# Altium PCB Brain_Stim_Main.PcbDoc (part 1 of 2)
Units mil, origin at the board's own origin, x right, y up, seen from the top; angles counter-clockwise.
Board outline 3955.03 x 5620.03 mil, 4 copper layers (Top Layer, Internal 1, Internal 2, Bottom Layer), stack 23.756 mil thick; 133 components, 111 nets, 539 pads, 126 vias.
Unrouted connection lines stored in the file: 299.
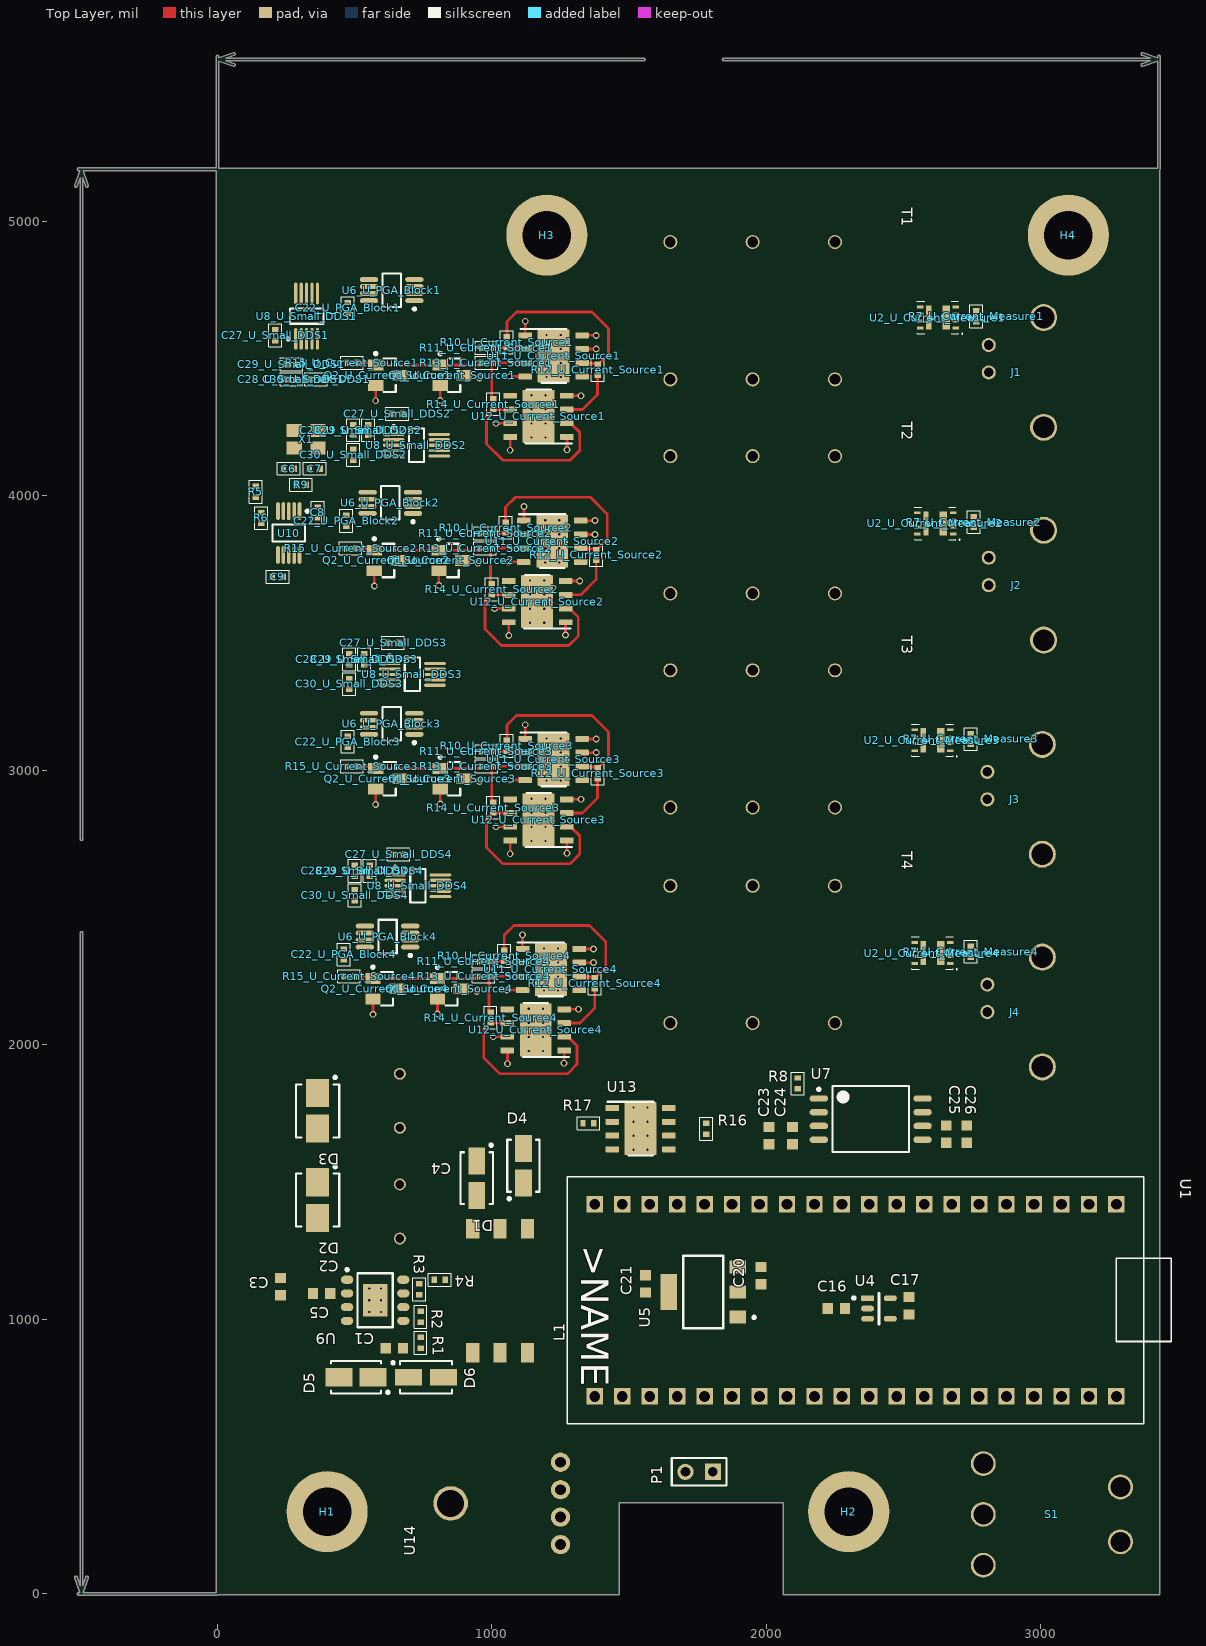
[diagram p0: Top Layer view]
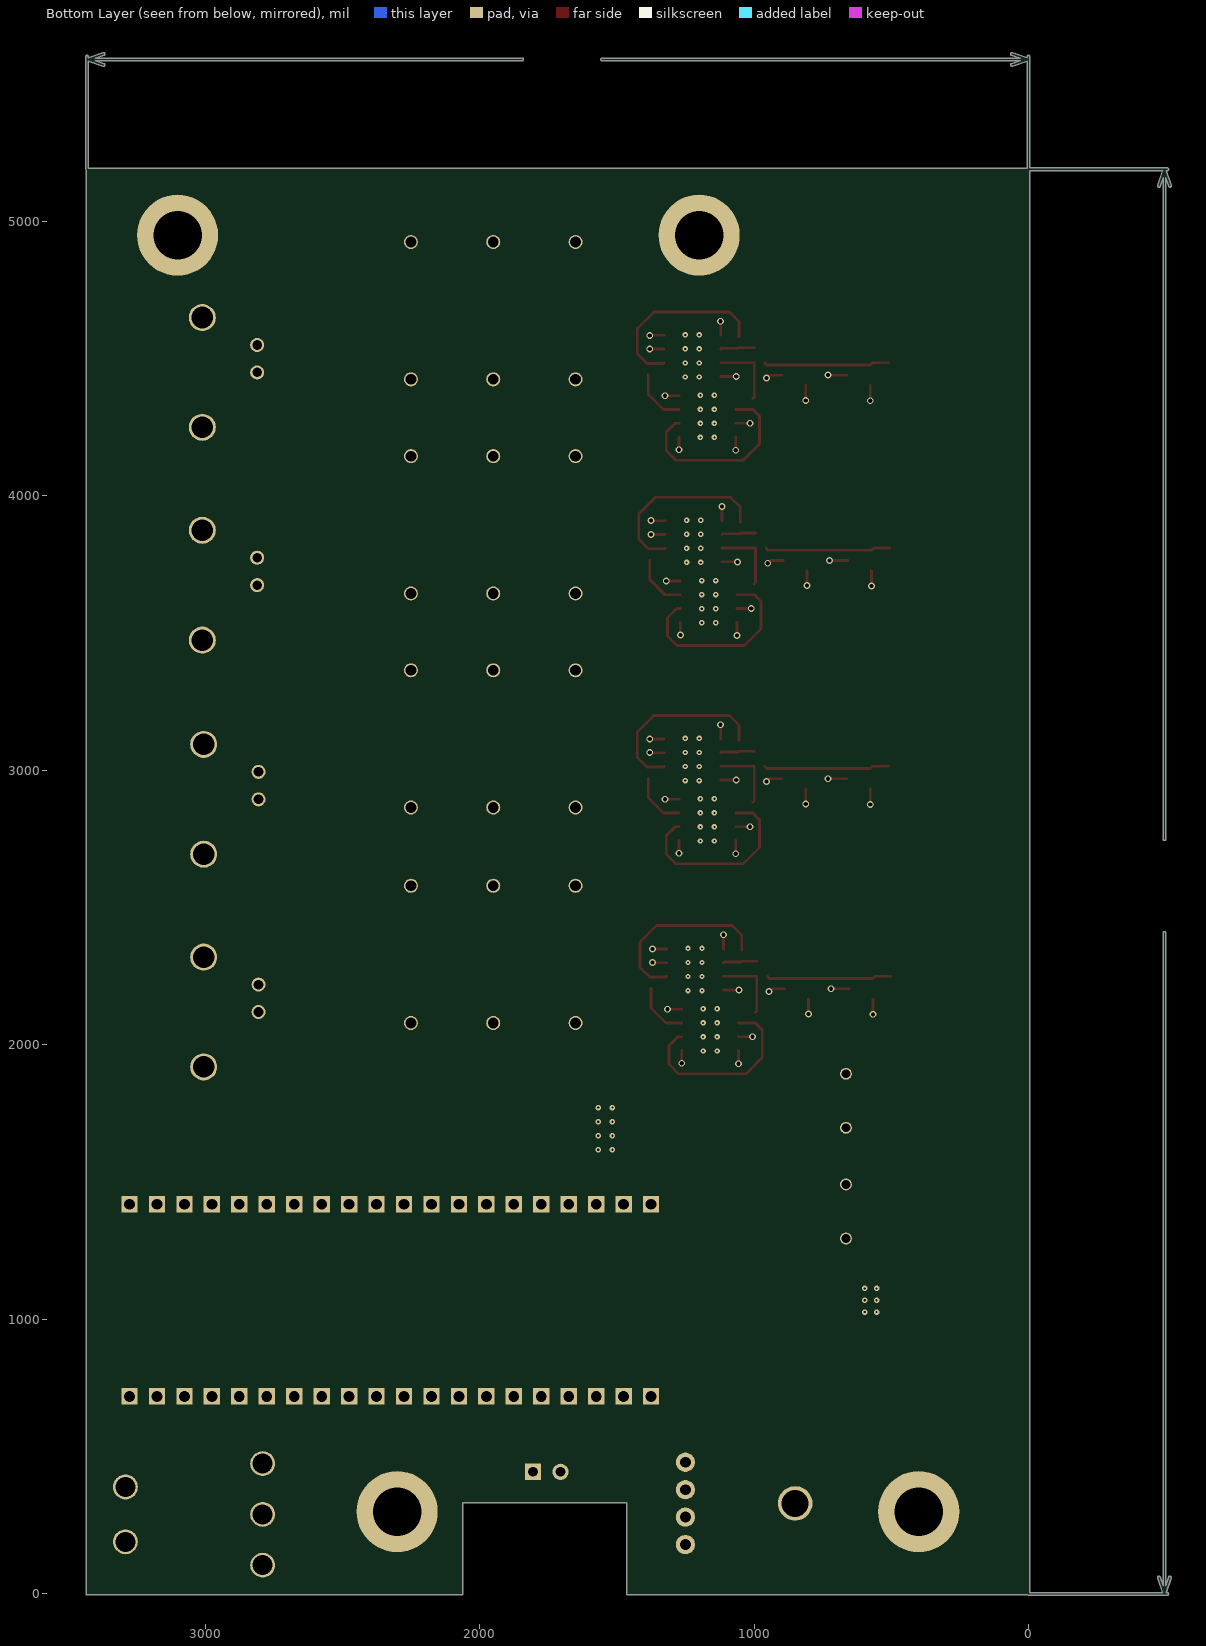
[diagram p1: Bottom Layer view, seen from below]

## Layer stack, top to bottom
Top Solder: solder mask 0.4, Solder Resist, Dk 3.5
Top Layer: signal copper 1.4
Dielectric 2: prepreg 2.8, PP-006, Dk 4.1
Internal 1: signal copper 1.378
Dielectric 1: dielectric 12.6, FR-4, Dk 4.8
Internal 2: signal copper 1.378
Dielectric 3: prepreg 2.8, PP-006, Dk 4.1
Bottom Layer: signal copper 1.4
Bottom Solder: solder mask 0.4, Solder Resist, Dk 3.5

## Board outline
-501.96,5.02 -519.76,58.41 cw(c-515,60) -510.24,61.59 -500.01,30.9 -500.01,2408.05 cw(c-495,2408.05) -489.99,2408.05 -489.99,30.9 -479.76,61.59 cw(c-475,60) -469.99,60 -470.24,58.41 -488.04,5.02 -3.52,5.02 -3.52,5184.99 -488.04,5184.99 -470.24,5131.59 -469.99,5130 cw(c-475,5130) -479.76,5128.41 -489.99,5159.1 -489.99,2749.95 cw(c-495,2749.95) -500.01,2749.95 -500.01,5159.1 -510.24,5128.41 cw(c-515,5130) -519.76,5131.59 -501.96,5184.99 -505,5184.99 cw(c-505,5190) -505,5195.01 -5.01,5195.01 -5.01,5600 cw(c0,5600) 5.01,5600 5.01,5596.96 58.41,5614.76 cw(c60,5610) 65.01,5610 cw(c60,5610) 61.59,5605.24 30.9,5595.01 1553.04,5595.01 cw(c1553.04,5590) 1558.06,5590 cw(c1553.04,5590) 1553.04,5584.99 30.9,5584.99 61.59,5574.76 cw(c60,5570) 65.01,5570 cw(c60,5570) 58.41,5565.24 5.01,5583.04 5.01,5193.52 3424.99,5193.52 3424.99,5583.04 3371.59,5565.24 cw(c3370,5570) 3368.41,5574.76 3399.1,5584.99 1844.96,5584.99 cw(c1844.96,5590) 1844.96,5595.01 3399.1,5595.01 3368.41,5605.24 cw(c3370,5610) 3371.59,5614.76 3424.99,5596.96 3424.99,5600 cw(c3430,5600) 3435.01,5600 3435.01,5190 3433.52,5186.43 3433.52,0 cw(c3430,0) 3430,-3.52 2065,-3.52 cw(c2065,0) 2061.48,0 2061.48,331.48 1463.52,331.48 1463.52,0 cw(c1460,0) 1460,-3.52 3.57,-3.52 0,-5.02 -505,-5.02 cw(c-505,0)

## Design rules (kind name [scope] priority, off if disabled: settings)
BoardOutlineClearance [All] p1: gap=7.87 ignorepadtopadclearanceinfootprint=FALSE
Clearance [All] p1: gap=4 ignorepadtopadclearanceinfootprint=FALSE except(5: Arc-Via Track-Via SMDPad-Via THPad-Via Via-Via Via-Fill Via-Poly Via-Region Via-Text; 9.84: Arc-Hole Track-Hole SMDPad-Hole THPad-Hole Via-Hole Fill-Hole Poly-Hole Region-Hole Text-Hole)
ComponentClearance [All] p1: gap=4 collisioncheckmode=3 verticalgap=4 showdistances=TRUE
DiffPairsRouting [All] p1: maxlimit=4 minlimit=4 mostfreqgap=4 toplayer_minwidth=4 toplayer_maxwidth=71497.94 toplayer_prefwidth=4 midlayer1_minwidth=4 midlayer1_maxwidth=71497.94 midlayer1_prefwidth=4 midlayer2_minwidth=4 midlayer2_maxwidth=71497.94 midlayer2_prefwidth=4 bottomlayer_minwidth=4 bottomlayer_maxwidth=71497.94 bottomlayer_prefwidth=4 maxuncoupledlength=500
Height [All] p1: minheight=0 maxheight=71497.94 prefheight=500
HoleSize [All] p1: absolutevalues=TRUE maxlimit=248.03 minlimit=7.87 maxpercent=80.000 minpercent=20.000
HoleToHoleClearance [All] p1: gap=9.84 allowstackedmicrovias=FALSE
MinimumAnnularRing [All] p1: minimumring=3
MinimumSolderMaskSliver [All] p1: minsoldermaskwidth=0
PlaneClearance [All] p1: clearance=4
PlaneConnect PlaneConnectPowerPads [InPadClass('PowerPads')] p1: planeconnectstyle=Direct reliefexpansion=20 reliefentries=4 reliefconductorwidth=10 reliefairgap=10
PlaneConnect [All] p2: pad.planeconnectstyle=Relief pad.reliefexpansion=11.81 pad.reliefentries=4 pad.reliefconductorwidth=4 pad.reliefairgap=4 via.planeconnectstyle=Direct via.reliefexpansion=11.81 via.reliefentries=4 via.reliefconductorwidth=5 via.reliefairgap=5
PolygonConnect PolygonConnectPowerPads [All vs (InPadClass('PowerPads'))] p1: connectstyle=Direct reliefconductorwidth=10 reliefentries=4 polygonreliefangle="90 Angle" airgapwidth=10
PolygonConnect [All] p2: thpad.connectstyle=Relief thpad.reliefconductorwidth=4 thpad.reliefentries=4 thpad.polygonreliefangle="90 Angle" thpad.airgapwidth=4 smdpad.connectstyle=Relief smdpad.reliefconductorwidth=4 smdpad.reliefentries=4 smdpad.polygonreliefangle="90 Angle" smdpad.airgapwidth=4 via.connectstyle=Direct via.reliefconductorwidth=5 via.reliefentries=4 via.polygonreliefangle="90 Angle" via.airgapwidth=5
RoutingVias [All] p1: holewidth=7.87 width=17.72 viastyle="Through Hole" minholewidth=7.87 minwidth=17.72 maxholewidth=248.03 maxwidth=257.87
SilkToSilkClearance [All] p1: silktosilkclearance=0
SilkToSolderMaskClearance [IsPad] p1: minsilkscreentomaskgap=4 clearancetoexposedcopper=TRUE
SolderMaskExpansion [All] p1: expansion=2.95 istentingtop=FALSE
Width [All] p1: maxlimit=71497.94 minlimit=4 preferedwidth=4
20 further rules are at their usual default settings.

## Classes and differential pairs
channel class Current_Source: U_Current_Source1 U_Current_Source2 U_Current_Source3 U_Current_Source4
net class CS_OUT[1..4]: CS_OUT1 CS_OUT2 CS_OUT3 CS_OUT4
net class CS_IN_SIG[1..4]: CH_AMP1 CH_AMP2 CH_AMP3 CH_AMP4
channel class Small_DDS: U_Small_DDS1 U_Small_DDS2 U_Small_DDS3 U_Small_DDS4
net class DDS_OUT[4..1]: DDS_OUT1 DDS_OUT2 DDS_OUT3 DDS_OUT4
net class DDS_FSYNC[4..1]: DDS_FSYNC1 DDS_FSYNC2 DDS_FSYNC3 DDS_FSYNC4
component class U_MCU: *
net class CH_AMP[4..1]: CH_AMP1 CH_AMP2 CH_AMP3 CH_AMP4
net class \P\G\A\_\C\S\[4..1]: \P\G\A\_\C\S\1 \P\G\A\_\C\S\2 \P\G\A\_\C\S\3 \P\G\A\_\C\S\4
channel class PGA_Block: U_PGA_Block1 U_PGA_Block2 U_PGA_Block3 U_PGA_Block4
channel class Current_Measure: U_Current_Measure1 U_Current_Measure2 U_Current_Measure3 U_Current_Measure4
net class Wave_In[4..1]: DDS_OUT1 DDS_OUT2 DDS_OUT3 DDS_OUT4
net class TF_LOW[4..1]: TF_LOW1 TF_LOW2 TF_LOW3 TF_LOW4
net class FROM_BRAIN[4..1]: FROM_BRAIN1 FROM_BRAIN2 FROM_BRAIN3 FROM_BRAIN4
net class ADC_DATA[4..1]: ADC_DATA1 ADC_DATA2 ADC_DATA3 ADC_DATA4

## Components (designator, comment, footprint, x,y, rotation, side; value= is the part's Value field where it differs from the comment)
C1 "Cap" CAPC1608X05N 645,895 r180 top value=0.47u
C2 "220uF Cap" A759KR227M1VAAE024 665,1491.85 r180 top
C3 "Cap" CAPC1608X05N 230,1120 r270 top value=10u
C4 "220uF Cap" A759KR227M1VAAE024 665,1895 r180 top
C5 "Cap" CAPC1608X05N 380,1095 r0 top value=1u
C6 "Cap" 0402_Res 260,4100 r0 top value="4p DNP"
C7 "Cap" 0402_Res 355,4100 r180 top value="4p DNP"
C8 "Cap" 0402_Res 365,3940 r90 top value=0.1u
C9 "Cap" 0402_Res 220,3705 r0 top value=0.1u
C16 "Cap" CAPC1608X05N 2255,1040 r0 top value=1u
C17 "Cap" CAPC1608X05N 2520,1050 r90 top value=1u
C20 "Cap" CAPC1608X05N 1980,1160 r90 top value=1u
C21 "Cap" CAPC1608X05N 1560,1130 r270 top value=4.7u
C22_U_PGA_Block1 "Cap" 0402_Res 475,4685 r90 top value=0.1u (schematic designator C22)
C22_U_PGA_Block2 "Cap" 0402_Res 470,3910 r90 top value=0.1u (schematic designator C22)
C22_U_PGA_Block3 "Cap" 0402_Res 475,3105 r90 top value=0.1u (schematic designator C22)
C22_U_PGA_Block4 "Cap" 0402_Res 460,2330 r90 top value=0.1u (schematic designator C22)
C23 "Cap" CAPC1608X05N 2010,1670 r90 top value=10u
C24 "Cap" CAPC1608X05N 2095,1670 r90 top value=0.1u
C25 "Cap" CAPC1608X05N 2655,1675 r90 top value=0.22u
C26 "Cap" CAPC1608X05N 2730,1675 r90 top value=10u
C27_U_Small_DDS1 "Cap" 0402_Res 210,4585.31 r90 top value=10u (schematic designator C27)
C27_U_Small_DDS2 "Cap" 0402_Res 655.31,4300 r0 top value=10u (schematic designator C27)
C27_U_Small_DDS3 "Cap" 0402_Res 640.31,3465 r0 top value=10u (schematic designator C27)
C27_U_Small_DDS4 "Cap" 0402_Res 660.31,2695 r0 top value=10u (schematic designator C27)
C28_U_Small_DDS1 "Cap" 0402_Res 270,4425 r0 top value=0.1u (schematic designator C28)
C28_U_Small_DDS2 "Cap" 0402_Res 495,4240 r270 top value=0.1u (schematic designator C28)
C28_U_Small_DDS3 "Cap" 0402_Res 480,3405 r270 top value=0.1u (schematic designator C28)
C28_U_Small_DDS4 "Cap" 0402_Res 500,2635 r270 top value=0.1u (schematic designator C28)
C29_U_Small_DDS1 "Cap" 0402_Res 270,4480 r0 top value=10u (schematic designator C29)
C29_U_Small_DDS2 "Cap" 0402_Res 550,4240 r270 top value=10u (schematic designator C29)
C29_U_Small_DDS3 "Cap" 0402_Res 535,3405 r270 top value=10u (schematic designator C29)
C29_U_Small_DDS4 "Cap" 0402_Res 555,2635 r270 top value=10u (schematic designator C29)
C30_U_Small_DDS1 "Cap" 0402_Res 359.69,4425 r180 top value=0.1u (schematic designator C30)
C30_U_Small_DDS2 "Cap" 0402_Res 495,4150.31 r90 top value=0.1u (schematic designator C30)
C30_U_Small_DDS3 "Cap" 0402_Res 480,3315.31 r90 top value=0.1u (schematic designator C30)
C30_U_Small_DDS4 "Cap" 0402_Res 500,2545.31 r90 top value=0.1u (schematic designator C30)
D1 "Schottky 60V" "SK36A-LTP - duplicate" 945,1515 r270 top
D2 "Zener 30V" SMBJ5363B-TP 365,1435.04 r270 top
D3 "Zener 30V" SMBJ5363B-TP 365,1760 r270 top
D4 "Schottky 60V" "SK36A-LTP - duplicate" 1115,1560 r90 top
D5 "Zener 24V" "CMZ5934B TR13 PBFREE" 505,790 r180 top
D6 "Schottky 60V" "SK36A-LTP - duplicate" 760,790 r0 top
H1 "M4 Mounting Hole" "Mounting Hole"#1 805,525 r0 top
H2 "M4 Mounting Hole" "Mounting Hole"#2 2360,260 r0 top
H3 "M4 Mounting Hole" "Mounting Hole"#3 1300,4900 r0 top
H4 "M4 Mounting Hole" "Mounting Hole"#4 3120,5000 r0 top
J1 "BNC Connector" CONBNC002 2810,4650 r270 top
J2 "BNC Connector" CONBNC002 2810,3875 r270 top
J3 "BNC Connector" CONBNC002 2805,3095 r270 top
J4 "BNC Connector" CONBNC002 2805,2320 r270 top
L1 "Flyback Transformer" 750319949 1130,879.21 r90 top
P1 "Header 2" HDR1X2 1805,445 r180 top
Q1_U_Current_Source1 "Attenuator JFET" MMBF4117 855,4440 r0 top (schematic designator Q1)
Q1_U_Current_Source2 "Attenuator JFET" MMBF4117 850,3765 r0 top (schematic designator Q1)
Q1_U_Current_Source3 "Attenuator JFET" MMBF4117 855,2970 r0 top (schematic designator Q1)
Q1_U_Current_Source4 "Attenuator JFET" MMBF4117 845,2205 r0 top (schematic designator Q1)
Q2_U_Current_Source1 "Attenuator JFET" MMBF4117 620,4440 r0 top (schematic designator Q2)
Q2_U_Current_Source2 "Attenuator JFET" MMBF4117 615,3765 r0 top (schematic designator Q2)
Q2_U_Current_Source3 "Attenuator JFET" MMBF4117 620,2970 r0 top (schematic designator Q2)
Q2_U_Current_Source4 "Attenuator JFET" MMBF4117 610,2205 r0 top (schematic designator Q2)
R1 "Res1" 0402_Res 740,915 r270 top value=39
R2 "Res1" 0402_Res 740,1010 r90 top value=158k
R3 "Res1" 0402_Res 735,1110 r270 top value=115k
R4 "Res1" 0402_Res 810,1145 r180 top value=10k
R5 "DNP" 0402_Res 140,4015 r90 top value=4.7k
R6 "DNP" 0402_Res 160,3920 r270 top value=4.7k
R7_U_Current_Measure1 "Res1" 0402_Res 2765,4655 r90 top value=10 (schematic designator R7)
R7_U_Current_Measure2 "Res1" 0402_Res 2755,3905 r90 top value=10 (schematic designator R7)
R7_U_Current_Measure3 "Res1" 0402_Res 2745,3115 r90 top value=10 (schematic designator R7)
R7_U_Current_Measure4 "Res1" 0402_Res 2745,2340 r90 top value=10 (schematic designator R7)
R8 "Res1" 0402_Res 2115,1860 r270 top value=4.7k
R9 "DNP" 0402_Res 305,4040 r180 top value=1M
R10_U_Current_Source1 "DNP" 0402_Res 1055,4560 r90 top value=20k (schematic designator R10)
R10_U_Current_Source2 "DNP" 0402_Res 1050,3885 r90 top value=20k (schematic designator R10)
R10_U_Current_Source3 "DNP" 0402_Res 1055,3090 r90 top value=20k (schematic designator R10)
R10_U_Current_Source4 "DNP" 0402_Res 1045,2325 r90 top value=20k (schematic designator R10)
R11_U_Current_Source1 "DNP" 0402_Res 980,4540 r180 top value=100k (schematic designator R11)
R11_U_Current_Source2 "DNP" 0402_Res 975,3865 r180 top value=100k (schematic designator R11)
R11_U_Current_Source3 "DNP" 0402_Res 980,3070 r180 top value=100k (schematic designator R11)
R11_U_Current_Source4 "DNP" 0402_Res 970,2305 r180 top value=100k (schematic designator R11)
R12_U_Current_Source1 "DNP" 0402_Res 1385,4460 r90 top value=100 (schematic designator R12)
R12_U_Current_Source2 "DNP" 0402_Res 1380,3785 r90 top value=100 (schematic designator R12)
R12_U_Current_Source3 "DNP" 0402_Res 1385,2990 r90 top value=100 (schematic designator R12)
R12_U_Current_Source4 "DNP" 0402_Res 1375,2225 r90 top value=100 (schematic designator R12)
R13_U_Current_Source1 "DNP" 0402_Res 980,4485 r180 top value=100k (schematic designator R13)
R13_U_Current_Source2 "DNP" 0402_Res 975,3810 r180 top value=100k (schematic designator R13)
R13_U_Current_Source3 "DNP" 0402_Res 980,3015 r180 top value=100k (schematic designator R13)
R13_U_Current_Source4 "DNP" 0402_Res 970,2250 r180 top value=100k (schematic designator R13)
R14_U_Current_Source1 "DNP" 0402_Res 1005,4335 r90 top value=20k (schematic designator R14)
R14_U_Current_Source2 "DNP" 0402_Res 1000,3660 r90 top value=20k (schematic designator R14)
R14_U_Current_Source3 "DNP" 0402_Res 1005,2865 r90 top value=20k (schematic designator R14)
R14_U_Current_Source4 "DNP" 0402_Res 995,2100 r90 top value=20k (schematic designator R14)
R15_U_Current_Source1 "DNP" 0402_Res 490,4485 r180 top value=20k (schematic designator R15)
R15_U_Current_Source2 "DNP" 0402_Res 485,3810 r180 top value=20k (schematic designator R15)
R15_U_Current_Source3 "DNP" 0402_Res 490,3015 r180 top value=20k (schematic designator R15)
R15_U_Current_Source4 "DNP" 0402_Res 480,2250 r180 top value=20k (schematic designator R15)
R16 "DNP" 0402_Res 1781.65,1695 r270 top value=50k
R17 "DNP" 0402_Res 1351.65,1715 r180 top value=100k
S1 "100SP1T2B4M6QE" 100SP1T2B4M6QE 2790,104.96 r0 top
T1 "108E" 108E 1650,4425 r0 top
T2 "108E" 108E 1650,3645 r0 top
T3 "108E" 108E 1650,2865 r0 top
T4 "108E" 108E 1650,2080 r0 top
U1 "RASPBERRY_PI_PICO" RASPBERRY_PI_PICO 2375,1070 r270 top
U2_U_Current_Measure1 "ADC" SON65P350X100_HS-9N 2625,4650 r180 top (schematic designator U2)
U2_U_Current_Measure2 "ADC" SON65P350X100_HS-9N 2615,3900 r180 top (schematic designator U2)
U2_U_Current_Measure3 "ADC" SON65P350X100_HS-9N 2605,3110 r180 top (schematic designator U2)
U2_U_Current_Measure4 "ADC" SON65P350X100_HS-9N 2605,2335 r180 top (schematic designator U2)
U4 "TLV74118PDBVR" FP-DBV0005A-IPC_C 2410,1040 r0 top
U5 "LDL1117S50R" FP-SOT-223-0046067_14-MFG 1770,1100 r180 top
U6_U_PGA_Block1 "MCP6S21T-I/MS" MSOP-MS8_N 635,4750 r180 top (schematic designator U6)
U6_U_PGA_Block2 "MCP6S21T-I/MS" MSOP-MS8_N 630,3975 r180 top (schematic designator U6)
U6_U_PGA_Block3 "MCP6S21T-I/MS" MSOP-MS8_N 635,3170 r180 top (schematic designator U6)
U6_U_PGA_Block4 "MCP6S21T-I/MS" MSOP-MS8_N 620,2395 r180 top (schematic designator U6)
U7 "ADUM6028-3WBRIZ-RL" ADUM6028-3WBRIZ-RL 2380,1730 r0 top
U8_U_Small_DDS1 "AD9833BRMZ" ADI-RM-10_M 325,4655 r90 top (schematic designator U8)
U8_U_Small_DDS2 "AD9833BRMZ" ADI-RM-10_M 725,4185 r0 top (schematic designator U8)
U8_U_Small_DDS3 "AD9833BRMZ" ADI-RM-10_M 710,3350 r0 top (schematic designator U8)
U8_U_Small_DDS4 "AD9833BRMZ" ADI-RM-10_M 730,2580 r0 top (schematic designator U8)
U9 "LT8302ES8E#TRPBF" LT-S8E-8_V 575,1070 r0 top
U10 "Si5351A-B-GT" SLAB-MSOP-10_N 260,3865 r270 top
U11_U_Current_Source1 "OPA454AIDDA" DDA0008C_L 1225,4510 r0 top (schematic designator U11)
U11_U_Current_Source2 "OPA454AIDDA" DDA0008C_L 1220,3835 r0 top (schematic designator U11)
U11_U_Current_Source3 "OPA454AIDDA" DDA0008C_L 1225,3040 r0 top (schematic designator U11)
U11_U_Current_Source4 "OPA454AIDDA" DDA0008C_L 1215,2275 r0 top (schematic designator U11)
U12_U_Current_Source1 "OPA454AIDDA" DDA0008C_L 1170,4290 r180 top (schematic designator U12)
U12_U_Current_Source2 "OPA454AIDDA" DDA0008C_L 1165,3615 r180 top (schematic designator U12)
U12_U_Current_Source3 "OPA454AIDDA" DDA0008C_L 1170,2820 r180 top (schematic designator U12)
U12_U_Current_Source4 "OPA454AIDDA" DDA0008C_L 1160,2055 r180 top (schematic designator U12)
U13 "OPA454AIDDA" DDA0008C_L 1541.65,1695 r0 top
U14 "Adafruit 12V Bias Voltage Boost Converter - TPS61040" 12V_Suppy 1250,180 r90 top
X1 "XTAL" XTAL_Basic 366.61,4237.99 r180 top

## Footprints (in the part's own frame and the unit in brackets; to place one, negate y for a bottom-side part, rotate by r counter-clockwise, add the part's x,y. Pads: shape width x height; smd on the part's side, far side on the other; paste and mask are expansions set on the pad)
12V_Suppy [mil]
  round 70 / inner round 98.43 / far side round 70 hole 39.37: EN(300,0) GND(0,0) V+(100,0) VIN(200,0)
  round 125.98 / inner round 98.43 / far side round 125.98 hole 98.43: M1(150,400)
  body extent -50,-100 354,500, height 150
100SP1T2B4M6QE [mm]
  round 2.3 hole 1.85: 1(0,9.4) 2(0,4.7) 3(0,0) 4(12.7,2.16) 5(12.7,7.24)
108E [mm]
  round 1.3 / inner round 2.5 / far side round 1.3 hole 1: 1(0,0) 2(7.62,0) 3(15.24,0) 4(15.24,12.7) 5(7.62,12.7) 6(0,12.7)
  body extent -5.46,-3.3 20.57,16.13, height 20.2
0402_Res [mm]
  rect 0.5x0.6 smd: 1(-0.5,0) 2(0.5,0)
  silkscreen extent -1.05,-0.6 1.05,0.6
750319949 [mm]
  rect 1.82x1.22 smd: 1(0,5.08) 2(0,2.54) 3(0,0) 4(11.45,0) 5(11.45,2.54) 6(11.45,5.08)
  body extent 1,-1.8 10.45,6.7, height 5.5
A759KR227M1VAAE024 [mm]
  round 1.1 hole 0.8: 1(0,0) 2(0,5)
  body extent -5,-2.5 5,7.5, height 17.4
ADI-RM-10_M [mm] "TSSOP, 10-Leads, Body 3x3mm, Pitch 0.5mm, IPC Low Density"
  oval 2x0.3 smd: 1(-2.1,1) 2(-2.1,0.5) 3(-2.1,0) 4(-2.1,-0.5) 5(-2.1,-1) 6(2.1,-1) 7(2.1,-0.5) 8(2.1,0) 9(2.1,0.5) 10(2.1,1)
  silkscreen extent -2.22,-1.55 0.7,1.82, body extent -1.55,-1.55 1.55,1.55, height 1.1
ADUM6028-3WBRIZ-RL [mm]
  oval 1.7x0.6 smd: 1(-4.8,1.905) 2(-4.8,0.635) 3(-4.8,-0.635) 4(-4.8,-1.905) 5(4.8,-1.905) 6(4.8,-0.635) 7(4.8,0.635) 8(4.8,1.905)
  silkscreen extent -4.92,-3.05 3.55,3.05, body extent -5.16,-3.05 5.16,3.05, height 2.65
CAPC1608X05N [mm] "Chip Capacitor, 2-Leads, Body 1.55x0.85mm, IPC Medium Density"
  rect 0.95x1 smd: 1(-0.8,0) 2(0.8,0)
  body extent -0.8,-0.45 0.8,0.45, height 0.5
"CMZ5934B TR13 PBFREE" [mm]
  rect 2.5x1.7 smd: 1(-1.575,0) 2(1.575,0)
  silkscreen extent -3.08,-1.5 2.3,1.52, body extent -2.52,-1.46 2.52,1.46, height 2.62
CONBNC002 [mm]
  round 1.3 hole 0.89: 1(5.08,0) 2(2.54,0)
  round 2.5 hole 2: 3(0,5.08) 4(10.16,5.08)
  body extent -2.37,0 12.53,35.15, height 13.1
DDA0008C_L [mm] "SOP, 8-Leads, Body 4x5mm, Pitch 1.27mm, Thermal Pad 2.4x3mm, IPC High Density"
  rrect18% 1.25x0.55 smd: 1(-2.625,1.905) 2(-2.625,0.635) 3(-2.625,-0.635) 4(-2.625,-1.905) 5(2.625,-1.905) 6(2.625,-0.635) 7(2.625,0.635) 8(2.625,1.905)
  rrect4% 2.95x4.9 smd paste-1.5 mask-1.5: 9(0,0)
  rrect4% 2.49x3 on Top Paste: 9(0,0)
  rrect4% 2.49x3 on Top Solder: 9(0,0)
  silkscreen extent -3.08,-2.47 1.2,2.5, body extent -3.01,-2.45 3.01,2.45, height 1.7
FP-DBV0005A-IPC_C [mm]
  rect 1.205x0.532 smd paste+0 mask+0: 1(-1.05,0.95)
  rrect100% 1.205x0.532 smd paste+0 mask+0: 2(-1.05,0) 3(-1.05,-0.95) 4(1.05,-0.95) 5(1.05,0.95)
  silkscreen extent -2.45,-1.45 0.05,1.45, body extent -1.75,-1.55 1.75,1.55, height 0.25
FP-SOT-223-0046067_14-MFG [mm]
  rect 1.5x1.2 smd paste+0 mask+0: 1(-3.2,2.3) 2(-3.2,0) 3(-3.2,-2.3)
  rect 1.5x3.3 smd paste+0 mask+0: 4(3.2,0)
  silkscreen extent -4.83,-3.35 1.85,3.35, body extent -4.05,-3.45 4.05,3.45, height 0.25
HDR1X2 [mm] "Connector; Header; 2 Position"
  rect 1.5x1.5 hole 0.9: 1(0,0)
  round 1.5 hole 0.9: 2(2.54,0)
  silkscreen extent -1.27,-1.27 3.81,1.27
LT-S8E-8_V [mm] "SOIC, 8-Leads, Body 4.9x3.9mm, Pitch 1.27mm, Thermal Pad 3.25x2.26mm, Recommended"
  oval 1.143x0.76 smd: 1(-2.602,1.905) 2(-2.602,0.635) 3(-2.602,-0.635) 4(-2.602,-1.905) 5(2.601,-1.905) 6(2.601,-0.635) 7(2.601,0.635) 8(2.601,1.905)
  rect 2.26x2.99 smd: 9(0,0)
  silkscreen extent -2.73,-2.5 1.62,2.96, body extent -3.01,-2.45 3.01,2.45, height 1.75
MMBF4117 [mm]
  rect 1.4x1 smd: 1(-1.1,0.95) 2(-1.1,-0.95) 3(1.1,0)
  silkscreen extent -1.22,-1.55 0.75,2.12, body extent -1.35,-1.56 1.35,1.56, height 1.2
"Mounting Hole"#1 [mm]
  round 7.5 / inner round 2.5 / far side round 7.5 hole 4.5: M4(-10.287,-5.715)
"Mounting Hole"#2 [mm]
  round 7.5 / inner round 2.5 / far side round 7.5 hole 4.5: M4(-1.524,1.016)
"Mounting Hole"#3 [mm]
  round 7.5 / inner round 2.5 / far side round 7.5 hole 4.5: M4(-2.54,1.27)
"Mounting Hole"#4 [mm]
  round 7.5 / inner round 2.5 / far side round 7.5 hole 4.5: M4(-0.508,-1.27)
MSOP-MS8_N [mm] "TSOP, 8-Leads, Body 3x3mm, Pitch 0.65mm, IPC Medium Density"
  oval 1.7x0.45 smd: 1(-2.1,0.975) 2(-2.1,0.325) 3(-2.1,-0.325) 4(-2.1,-0.975) 5(2.1,-0.975) 6(2.1,-0.325) 7(2.1,0.325) 8(2.1,0.975)
  silkscreen extent -2.22,-1.55 0.85,1.87, body extent -1.55,-1.55 1.55,1.55, height 1.1
RASPBERRY_PI_PICO [mm]
  rect 1.508x1.508 / inner round 1.508 / far side rect 1.508x1.508 hole 1: 3V3(8.89,12.7) 3V3_EN(8.89,15.24) ADC_VREF(8.89,10.16) AGND(8.89,5.08) GND(8.89,17.78) GND2(8.89,-7.62) GND3(8.89,-20.32) GND4(-8.89,17.78) GND5(-8.89,5.08) GND6(-8.89,-7.62) GND7(-8.89,-20.32) GP0(-8.89,22.86) GP1(-8.89,20.32) GP2(-8.89,15.24) GP3(-8.89,12.7) GP4(-8.89,10.16) GP5(-8.89,7.62) GP6(-8.89,2.54) GP7(-8.89,0) GP8(-8.89,-2.54) GP9(-8.89,-5.08) GP10(-8.89,-10.16) GP11(-8.89,-12.7) GP12(-8.89,-15.24) GP13(-8.89,-17.78) GP14(-8.89,-22.86) GP15(-8.89,-25.4) GP16(8.89,-25.4) GP17(8.89,-22.86) GP18(8.89,-17.78) GP19(8.89,-15.24) GP20(8.89,-12.7) GP21(8.89,-10.16) GP22(8.89,-5.08) GP26_A0(8.89,0) GP27_A1(8.89,2.54) GP28_A2(8.89,7.62) RUN(8.89,-2.54) VBUS(8.89,22.86) VSYS(8.89,20.32)
  silkscreen extent -11.43,-27.94 11.43,27.94, body extent -10.5,-25.5 10.5,26.8, height 3.73
"SK36A-LTP - duplicate" [mm] "Molded Diode, 2-Leads, Body 4.38x2.59mm, IPC Medium Density"
  rect 2.5x1.55 smd: 1(-1.6,0) 2(1.6,0)
  silkscreen extent -3.17,-1.5 2.4,1.5, body extent -2.6,-1.46 2.6,1.46, height 2.44
SLAB-MSOP-10_N [mm] "SOP, 10-Leads, Body 3x3mm, Pitch 0.5mm, IPC Medium Density"
  oval 1.65x0.35 smd: 1(-2.025,1) 2(-2.025,0.5) 3(-2.025,0) 4(-2.025,-0.5) 5(-2.025,-1) 6(2.025,-1) 7(2.025,-0.5) 8(2.025,0) 9(2.025,0.5) 10(2.025,1)
  silkscreen extent -2.15,-1.5 0.8,1.85, body extent -1.5,-1.5 1.5,1.5, height 1.1
SMBJ5363B-TP [mm] "Molded Diode, 2-Leads, Body 4.46x3.62mm, IPC Medium Density"
  rect 2.6x2.15 smd: 1(-1.65,0) 2(1.65,0)
  silkscreen extent -3.22,-2 2.45,2, body extent -2.65,-1.97 2.65,1.97, height 2.62
SON65P350X100_HS-9N [mm] "SON, 8-Leads, Body 2.70x3.50mm, Pitch 0.65mm, Thermal Pad 2.23x0.70mm, IPC Medium Density"
  rect 0.6x0.25 smd: 1(-1.65,0.975) 2(-1.65,0.325) 3(-1.65,-0.325) 4(-1.65,-0.975) 5(1.65,-0.975) 6(1.65,-0.325) 7(1.65,0.325) 8(1.65,0.975)
  rect 0.7x2.23 smd: 9(-0.75,0)
  rect 0.5x2.23 smd: 10(0.85,0)
  silkscreen extent -2.3,-1.5 1.9,1.55, body extent -1.8,-1.4 1.8,1.4, height 1
XTAL_Basic [mm]
  rect 1.4x1.2 smd: 1(0,0) 2(2.2,0) 3(2.2,1.6) 4(0,1.6)

## Part data
C1 C3 C5 C6 C7 C8 C9 C16 C17 C20 C21 C22_U_PGA_Block1 C22_U_PGA_Block2 C22_U_PGA_Block3 C22_U_PGA_Block4 C23 C24 C25 C26 C27_U_Small_DDS1 C27_U_Small_DDS2 C27_U_Small_DDS3 C27_U_Small_DDS4 C28_U_Small_DDS1 C28_U_Small_DDS2 C28_U_Small_DDS3 C28_U_Small_DDS4 C29_U_Small_DDS1 C29_U_Small_DDS2 C29_U_Small_DDS3 C29_U_Small_DDS4 C30_U_Small_DDS1 C30_U_Small_DDS2 C30_U_Small_DDS3 C30_U_Small_DDS4: "Capacitor", LatestRevisionDate=17-Jul-2002, LatestRevisionNote="Re-released for DXP Platform.", PackageDescription="Radial Cap, Thru-Hole; 2 Leads; 0.3 in Pin Spacing", PackageReference=RAD-0.3, Published=8-Jun-2000, Publisher="Altium Limited"
C2: library part A759KR227M1VAAE024, Supplier Part Number 1=1189-50PZJ220M10X15-ND, Supplier 1=DigiKey
C4: library part A759KR227M1VAAE024, Supplier Part Number 1=61AK1211, Supplier 1=Newark
D1 D4 D6: library part SK36A-LTP, Supplier 1="Arrow Electronics"
D2 D3: library part SMBJ5363B-TP, Supplier 1="Arrow Electronics"
D5: library part "CMZ5934B TR13 PBFREE", Supplier Part Number 1=1514-CMZ5934BTR13PBFREECT-ND, Supplier 1=DigiKey
H1 H2 H3 H4: library part "MOUNTING HOLE M4"
J1 J2 J3 J4: library part CONBNC002, Supplier 1=Newark, Supplier Part Number 1=CONBNC002
L1: library part 750319949, Supplier Part Number 1=1297-750319949CT-ND, Supplier 1=DigiKey
P1: "Header, 2-Pin", LatestRevisionDate=17-Jul-2002, LatestRevisionNote="Re-released for DXP Platform.", Publisher="Altium Limited"
Q1_U_Current_Source1 Q1_U_Current_Source2 Q1_U_Current_Source3 Q1_U_Current_Source4 Q2_U_Current_Source1 Q2_U_Current_Source2 Q2_U_Current_Source3 Q2_U_Current_Source4: library part MMBF4117, Supplier 1="Arrow Electronics", Supplier Part Number 1=MMBF4117
R1 R2 R3 R4 R7_U_Current_Measure1 R7_U_Current_Measure2 R7_U_Current_Measure3 R7_U_Current_Measure4 R8: "Resistor", LatestRevisionDate=17-Jul-2002, LatestRevisionNote="Re-released for DXP Platform.", PackageDescription="Axial Device, Thru-Hole; 2 Leads; 0.3 in Pin Spacing", PackageReference=AXIAL-0.3, Published=8-Jun-2000, Publisher="Altium Limited"
R5 R6 R9 R10_U_Current_Source1 R10_U_Current_Source2 R10_U_Current_Source3 R10_U_Current_Source4 R11_U_Current_Source1 R11_U_Current_Source2 R11_U_Current_Source3 R11_U_Current_Source4 R12_U_Current_Source1 R12_U_Current_Source2 R12_U_Current_Source3 R12_U_Current_Source4 R13_U_Current_Source1 R13_U_Current_Source2 R13_U_Current_Source3 R13_U_Current_Source4 R14_U_Current_Source1 R14_U_Current_Source2 R14_U_Current_Source3 R14_U_Current_Source4 R15_U_Current_Source1 R15_U_Current_Source2 R15_U_Current_Source3 R15_U_Current_Source4 R16 R17: library part Res1, "Resistor", LatestRevisionDate=17-Jul-2002, LatestRevisionNote="Re-released for DXP Platform.", PackageDescription="Axial Device, Thru-Hole; 2 Leads; 0.3 in Pin Spacing", PackageReference=AXIAL-0.3, Published=8-Jun-2000, Publisher="Altium Limited"
S1: Supplier Part Number 1=EG2362-ND, Supplier 1=DigiKey
T1 T2 T3 T4: Supplier Part Number 1=HM2380-ND, Supplier 1=DigiKey
U1: "Raspberry Pi Board, Arm Cortex-M0+; Core Architecture:Arm; Core Sub-Architecture:Cortex-M0+; Kit Contents:Raspberry Pi Pico Board; No. Of Bits:32Bit; Silicon Core Number:Rp2040; Silicon Manufacturer:Raspberry Pi", Package=None, Check_prices=https://www.snapeda.com/parts/RASPBERRY%20PI%20PICO/Raspberry+Pi/view-part/?ref=eda, MF="Raspberry Pi", MP="RASPBERRY PI PICO", SnapEDA_Link=https://www.snapeda.com/parts/RASPBERRY%20PI%20PICO/Raspberry+Pi/view-part/?ref=snap
U2_U_Current_Measure1 U2_U_Current_Measure2 U2_U_Current_Measure3 U2_U_Current_Measure4: Supplier Part Number 1=296-AMC0106M05DENRCT-ND, Supplier 1=DigiKey
U4: library part CMP-04917-000111-2, "None", Case/Package=SOT-23-5, Dropout Voltage=695mV, Max Input Voltage=5.5V, Max Operating Temperature=125°C, Max Supply Current=75uA, Min Operating Temperature=-40°C, Min Output Voltage=1.8V, Output Current=150mA, Power Supply Rejection Ratio (PSRR)=55dB, Quiescent Current=50uA, Mount="Surface Mount", Number of Regulators=1, Output Configuration=Positive, Output Type=Fixed, Packaging="Cut Tape", RoHS Compliant=Yes
U5: library part CMP-12153-000005-1, "IC REG LINEAR 5V 1.2A SOT223", Dropout Voltage=350mV, Manufacturer=STMicroelectronics, Max Junction Temp=+150°C, Max Supply Voltage=18V, Min Supply Voltage=2.6V, Nominal Supply Current=250uA, Output Current=2A, Output Voltage=5V, Package=SOT-223-0046067_14, Temperature="-40°C to +125°C", Temperature Range High=+125°C, Temperature Range Low=-40°C, Accuracy Percentage=2%, Automotive=No, Category=IC, ComponentLink2Description=Datasheet, ComponentLink2URL=https://www.st.com/content/ccc/resource/technical/document/datasheet/group3/0e/5a/00/ca/10/1a/4f/a5/DM00366442/files/DM00366442.pdf/jcr:content/translations/en.DM00366442.pdf, Device Class L1="Integrated Circuits (ICs)", Device Class L2="Power Management ICs", Device Class L3="Voltage Regulators - Linear", Digikey Description="IC REG LINEAR 5V 1.2A SOT223", Height=1.9mm, Lead Free=Yes, Manufacturer Part Number=LDL1117S50R, Mouser Description="LDL1117 Series 1.2 A 5 V High PSRR LDO Linear Voltage Regulator - SOT-223", Number Of Outputs=1, Octopart=https://octopart.com/ldl1117s50r-stmicroelectronics-81876164, Output Type=Fixed, RoHS=TRUE, Standoff Height=0.02mm
U6_U_PGA_Block1 U6_U_PGA_Block2 U6_U_PGA_Block3 U6_U_PGA_Block4: library part CMP-0187-00515-2, "Single-Ended, Rail-to-Rail Input/Output, Low-Gain Programmable Gain Amplifier, 8-Pin MSOP, Industrial Temperature, Tape and Reel", ComponentLink1Description="Manufacturer URL", ComponentLink1URL=http://www.microchip.com/, ComponentLink2Description=Datasheet, ComponentLink2URL=http://ww1.microchip.com/downloads/en/DeviceDoc/21117a.pdf, ComponentLink3Description="Package Specification", ComponentLink3URL=http://www.microchip.com/stellent/groups/techpub_sg/documents/packagingspec/en012702.pdf, DatasheetVersion="revA, Mar-2003", PackageDescription="8-Lead Plastic Micro Small Outline Package (MS) [MSOP]", PackageReference=MSOP-MS8, PackageVersion="revBB, Aug-2009", RevisionNote="URLs added."
U8_U_Small_DDS1 U8_U_Small_DDS2 U8_U_Small_DDS3 U8_U_Small_DDS4: library part CMP-0293-00077-1, "Low Power, 12.65 mW, 2.3 V to 5.5 V, Programmable Waveform Generator, 10-Bit, Serial, RM-10, 50 Tube, Pb-Free", Code_JEDEC=MO-187-BA, Compliance Range (V)=650mV, ComponentLink1Description="Manufacturer URL", ComponentLink1URL=www.analog.com, ComponentLink2Description=Datasheet, ComponentLink2URL=http://www.analog.com/static/imported-files/data_sheets/AD9833.pdf, ComponentLink3Description="Package Specification", ComponentLink3URL=http://www.analog.com/static/imported-files/packages/PKG_PDF/MSOP%28RM%29/RM_10.pdf, DatasheetVersion="Rev. D", FS Iout (mA nom)=3mA, I Supply total (max)=5.5mA, I/O Interface=Serial, Master fclk=25MHz, PackageDescription="10-Lead Mini Small Outline Package [MSOP]", PackageReference=RM-10, PackageVersion=5/8/2005, REFCLK Multiplier=No, Resolution (Bits)=10bit, Tuning Word Width (bits)=28bit
U9: library part CMP-0492-02712-1, "Micropower No-Opto Isolated Flyback Converter, 2.8 to 42 V, -40 to 125 degC, 8-Pin SOIC (S8E), RoHS, Tape and Reel", Output Current="3.6 A", PartNumber=LT8302, Temperature Max="125 degC", Temperature Min="-40 degC", ComponentLink1Description="Manufacturer URL", ComponentLink1URL=http://www.linear.com/, ComponentLink2Description=Datasheet, ComponentLink2URL=http://cds.linear.com/docs/en/datasheet/8302fa.pdf, ComponentLink3Description="Package Specification", ComponentLink3URL=http://cds.linear.com/docs/en/packaging/05081857_A_S8E.pdf, DatasheetVersion="Rev. A", Mounting Technology="Surface Mount", Number Of Outputs=1, PackageDescription="8-Pin Plastic Small Outline Integrated Circuit Package, Body 4.90 x 3.90 mm, Pitch 1.27 mm", PackageVersion="Rev. A, 10/2013", Packing="Tape and Reel", RoHS=TRUE, VIN Max="42 V", VIN Min="2.8 V"
U10: library part CMP-0510-00012-1, "I2C-Programmable Any-Frequency CMOS Clock Generator + VCXO, 2.5 / 3.3 V, 0.008 to 160 MHz Output, -40 to 85 degC, 10-pin SOP", Manufacturer="Silicon Labs", Output Frequency (MHz)="0.008 to 160", Code_IPC=J-STD-020, Code_JEDEC=MO-187, ComponentLink1Description="Manufacturer URL", ComponentLink1URL=http://www.silabs.com/, ComponentLink2Description=Datasheet, ComponentLink2URL=http://www.silabs.com/Support%20Documents/TechnicalDocs/Si5351.pdf, ComponentLink3Description="Package Specification", ComponentLink3URL="http://www.silabs.com/Support Documents/TechnicalDocs/C8051T60x.pdf", DatasheetVersion="Rev. 0.95", Mounting Technology="Surface Mount", Output Format=LVCMOS, PackageDescription="10-Pin Mini Small Outline Package, Body 3 x 3 mm, Pitch 0.5 mm", PackageReference=MSOP-10, PartNumber=Si5351A-B-GT, Reference Inputs=1, Sub-Family="Clock Generators", VDD="2.5 V; 3.3 V"
U11_U_Current_Source1 U11_U_Current_Source2 U11_U_Current_Source3 U11_U_Current_Source4 U12_U_Current_Source1 U12_U_Current_Source2 U12_U_Current_Source3 U12_U_Current_Source4 U13: library part CMP-0017-00714-2, "High Voltage (100V), High-Current (50mA) Operational Amplifier, G=1 Stable, 10 to 100 V, -55 to 125 degC, 8-pin SOP (DDA8), Green (RoHS & no Sb/Br)", Manufacturer="Texas Instruments", Rating=Catalog, Total Supply Voltage(Max)(+5V is 5, +/-5V is 10)=100, Total Supply Voltage(Min)(+5V is 5, +/-5V is 10)=10, CMRR(Min)(dB)=100, Code_JEDEC=MS-012, ComponentLink1Description="Manufacturer URL", ComponentLink1URL=http://www.ti.com/, ComponentLink2Description=Datasheet, ComponentLink2URL=http://www.ti.com/lit/ds/symlink/opa454.pdf, ComponentLink3Description="Package Specification", ComponentLink3URL=http://www.ti.com/litv/pdf/mpds092e, DatasheetVersion=SBOS391A, Eco-Plan="Green (RoHS & no Sb/Br)", GBW(Typ)(MHz)=2.5, IIB(Max)(pA)=100, Iq per channel(Max)(mA)=4, Mounting Technology="Surface Mount", Number of Channels=1, Offset Drift(Typ)(uV/C)=1.6, PackageDescription="8-Pin PowerPAD(TM) Plastic Small Outline, Body 3.9 x 4.9 mm, Pitch 1.27 mm", PackageReference=DDA0008C, PackageVersion="4202561/F, 12/2011", PartNumber=OPA454AIDDA, Slew Rate(Typ)(V/us)=13, Sub Family="General Purpose Amplifier, High Output Current Amplifier (>=50mA), High Supply Voltage Amplifier (>=30V), Precision Amplifier", Vio (25C)(Max)(mV)=4, Vn at 1kHz(Typ)(nV/rtHz)=47
U14: library part 12V_Supply
X1: Supplier Part Number 1=SER3691CT-ND, ComponentLink1Description="New link", Supplier 1=DigiKey

## Via types
v1: diameter 25, hole 15, Top Layer to Bottom Layer, 48 vias
v2: diameter 19.68, hole 7.87, Top Layer to Bottom Layer, 42 vias
v3: diameter 19.68, hole 7.87, Top Layer to Bottom Layer, tented both sides, 36 vias

## Nets (pads, with @x,y where several pads share a name; then routed paths per layer and width w, separated by ;. In a path a pad name is that pad's centre, name@x,y a point inside that pad or via, vN(x,y) a via of type N, cw(c..) or ccw(c..) an arc to the next point about the centre after c; other vN are vias at no path point)
1V8: C17.2 U4.5
3V3: C8.2 C9.2 C16.2 C23.2 C24.2 C27_U_Small_DDS1.2 C27_U_Small_DDS2.2 C27_U_Small_DDS3.2 C27_U_Small_DDS4.2 C28_U_Small_DDS1.2 C28_U_Small_DDS2.2 C28_U_Small_DDS3.2 C28_U_Small_DDS4.2 C29_U_Small_DDS1.2 C29_U_Small_DDS2.2 C29_U_Small_DDS3.2 C29_U_Small_DDS4.2 R5.2 R6.2 U2_U_Current_Measure1.8 U2_U_Current_Measure2.8 U2_U_Current_Measure3.8 U2_U_Current_Measure4.8 U4.1 U4.3 U7.3 U8_U_Small_DDS1.2 U8_U_Small_DDS2.2 U8_U_Small_DDS3.2 U8_U_Small_DDS4.2 U10.1 U10.7
3V3_A: C25.2 C26.2 U2_U_Current_Measure1.1 U2_U_Current_Measure2.1 U2_U_Current_Measure3.1 U2_U_Current_Measure4.1 U7.6
5V: C21.2 C22_U_PGA_Block1.2 C22_U_PGA_Block2.2 C22_U_PGA_Block3.2 C22_U_PGA_Block4.2 U5.2 U5.4 U6_U_PGA_Block1.8 U6_U_PGA_Block2.8 U6_U_PGA_Block3.8 U6_U_PGA_Block4.8 U11_U_Current_Source1.8 U11_U_Current_Source2.8 U11_U_Current_Source3.8 U11_U_Current_Source4.8 U12_U_Current_Source1.8 U12_U_Current_Source2.8 U12_U_Current_Source3.8 U12_U_Current_Source4.8 U13.8 | length 400
  Top Layer w10: v1(1056.65,1931.65) U12_U_Current_Source4.8 ; v1(1061.65,3491.65) U12_U_Current_Source2.8 ; v1(1066.65,2696.65) U12_U_Current_Source3.8 ; v1(1066.65,4166.65) U12_U_Current_Source1.8 ; U11_U_Current_Source4.8 v1(1370,2350) ; U11_U_Current_Source2.8 v1(1375,3910) ; U11_U_Current_Source3.8 v1(1380,3115) ; U11_U_Current_Source1.8 v1(1380,4585)
12V: C1.2 C3.2 C20.2 D5.2 L1.3 U5.3 U9.1 U9.3
30V: C2.1 D1.1 D2.1 U11_U_Current_Source1.7 U11_U_Current_Source2.7 U11_U_Current_Source3.7 U11_U_Current_Source4.7 U12_U_Current_Source1.7 U12_U_Current_Source2.7 U12_U_Current_Source3.7 U12_U_Current_Source4.7 U13.7 | length 413.2
  Top Layer w10: v1(1005,2030) U12_U_Current_Source4.7 ; v1(1010,3590) U12_U_Current_Source2.7 ; v1(1015,2795) U12_U_Current_Source3.7 ; v1(1015,4265) U12_U_Current_Source1.7 ; U11_U_Current_Source4.7 v1(1370,2300) ; U11_U_Current_Source2.7 v1(1375,3860) ; U11_U_Current_Source3.7 v1(1380,3065) ; U11_U_Current_Source1.7 v1(1380,4535)
-30V: C4.2 D3.2 D4.2 U11_U_Current_Source1.4 U11_U_Current_Source2.4 U11_U_Current_Source3.4 U11_U_Current_Source4.4 U12_U_Current_Source1.4 U12_U_Current_Source2.4 U12_U_Current_Source3.4 U12_U_Current_Source4.4 U13.4 | length 433.2
  Top Layer w10: v1(1055,2200) U11_U_Current_Source4.4 ; v1(1060,3760) U11_U_Current_Source2.4 ; v1(1065,2965) U11_U_Current_Source3.4 ; v1(1065,4435) U11_U_Current_Source1.4 ; U12_U_Current_Source4.4 v1(1315,2130) ; U12_U_Current_Source2.4 v1(1320,3690) ; U12_U_Current_Source3.4 v1(1325,2895) ; U12_U_Current_Source1.4 v1(1325,4365)
\P\G\A\_\C\S\1: U6_U_PGA_Block1.5
\P\G\A\_\C\S\2: U6_U_PGA_Block2.5
\P\G\A\_\C\S\3: U6_U_PGA_Block3.5
\P\G\A\_\C\S\4: U6_U_PGA_Block4.5
\V\_\I\S\O\_\E\N\: R8.2 U7.1
\X\T\A\L\: C6.2 R9.2 U10.3 X1.3
ADC_CLK: U2_U_Current_Measure1.7 U2_U_Current_Measure2.7 U2_U_Current_Measure3.7 U2_U_Current_Measure4.7
ADC_DAT: 
ADC_DATA1: U2_U_Current_Measure1.6
ADC_DATA2: U2_U_Current_Measure2.6
ADC_DATA3: U2_U_Current_Measure3.6
ADC_DATA4: U2_U_Current_Measure4.6
AGND: C25.1 C26.1 U2_U_Current_Measure1.4 U2_U_Current_Measure1.9 U2_U_Current_Measure2.4 U2_U_Current_Measure2.9 U2_U_Current_Measure3.4 U2_U_Current_Measure3.9 U2_U_Current_Measure4.4 U2_U_Current_Measure4.9 U7.5 U7.7 U7.8
ATT_SIG_U_Current_Source1: Q1_U_Current_Source1.1 Q2_U_Current_Source1.1 R13_U_Current_Source1.2 R15_U_Current_Source1.1 | length 458.1
  Top Layer w10: R15_U_Current_Source1.1 569.09,4485 Q2_U_Current_Source1.1 Q1_U_Current_Source1.1 954.68,4477.4 960.31,4483.03 R13_U_Current_Source1.2
ATT_SIG_U_Current_Source2: Q1_U_Current_Source2.1 Q2_U_Current_Source2.1 R13_U_Current_Source2.2 R15_U_Current_Source2.1 | length 458.1
  Top Layer w10: R15_U_Current_Source2.1 564.09,3810 Q2_U_Current_Source2.1 Q1_U_Current_Source2.1 949.68,3802.4 955.31,3808.03 R13_U_Current_Source2.2
ATT_SIG_U_Current_Source3: Q1_U_Current_Source3.1 Q2_U_Current_Source3.1 R13_U_Current_Source3.2 R15_U_Current_Source3.1 | length 458.1
  Top Layer w10: R15_U_Current_Source3.1 569.09,3015 Q2_U_Current_Source3.1 Q1_U_Current_Source3.1 954.68,3007.4 960.31,3013.03 R13_U_Current_Source3.2
ATT_SIG_U_Current_Source4: Q1_U_Current_Source4.1 Q2_U_Current_Source4.1 R13_U_Current_Source4.2 R15_U_Current_Source4.1 | length 458.1
  Top Layer w10: R15_U_Current_Source4.1 559.09,2250 Q2_U_Current_Source4.1 Q1_U_Current_Source4.1 944.68,2242.4 950.31,2248.03 R13_U_Current_Source4.2
ATTEN_CNTRL: Q1_U_Current_Source1.3 Q1_U_Current_Source2.3 Q1_U_Current_Source3.3 Q1_U_Current_Source4.3 Q2_U_Current_Source1.3 Q2_U_Current_Source2.3 Q2_U_Current_Source3.3 Q2_U_Current_Source4.3 R16.2 U13.6 | length 510.1
  Top Layer w10: Q2_U_Current_Source4.3 v1(720,2205) ; Q2_U_Current_Source2.3 v1(725,3765) ; Q2_U_Current_Source3.3 v1(730,2970) ; Q2_U_Current_Source1.3 v1(730,4440) ; Q1_U_Current_Source4.3 935,2205 v1(945,2195) ; Q1_U_Current_Source2.3 940,3765 v1(950,3755) ; Q1_U_Current_Source3.3 945,2970 v1(955,2960) ; Q1_U_Current_Source1.3 945,4440 v1(955,4430)
ATTEN_SET: R17.2
CH_AMP1: R15_U_Current_Source1.2
CH_AMP2: R15_U_Current_Source2.2
CH_AMP3: R15_U_Current_Source3.2
CH_AMP4: R15_U_Current_Source4.2
CLK_SCL: R5.1 U10.4
CLK_SDA: R6.1 U10.5
CS_MID_U_Current_Source1: R11_U_Current_Source1.2 R11_U_Current_Source2.2 R11_U_Current_Source3.2 R11_U_Current_Source4.2
CS_OUT1: R12_U_Current_Source1.1 T1.1 U12_U_Current_Source1.3 | length 204.8
  Top Layer w10: U12_U_Current_Source1.3 1273.62,4315.28 1330.28,4315.28 1385,4370 R12_U_Current_Source1.1
CS_OUT2: R12_U_Current_Source2.1 T2.1 U12_U_Current_Source2.3 | length 204.8
  Top Layer w10: U12_U_Current_Source2.3 1268.62,3640.28 1325.28,3640.28 1380,3695 R12_U_Current_Source2.1
CS_OUT3: R12_U_Current_Source3.1 T3.1 U12_U_Current_Source3.3 | length 204.8
  Top Layer w10: U12_U_Current_Source3.3 1273.62,2845.28 1330.28,2845.28 1385,2900 R12_U_Current_Source3.1
CS_OUT4: R12_U_Current_Source4.1 T4.1 U12_U_Current_Source4.3 | length 204.8
  Top Layer w10: U12_U_Current_Source4.3 1263.62,2080.28 1320.28,2080.28 1375,2135 R12_U_Current_Source4.1
DDS_CLK: U8_U_Small_DDS1.5 U8_U_Small_DDS2.5 U8_U_Small_DDS3.5 U8_U_Small_DDS4.5 U10.10
DDS_FSYNC1: U8_U_Small_DDS1.8
DDS_FSYNC2: U8_U_Small_DDS2.8
DDS_FSYNC3: U8_U_Small_DDS3.8
DDS_FSYNC4: U8_U_Small_DDS4.8
DDS_IO_UPDATE: 
DDS_OUT1: U6_U_PGA_Block1.2 U8_U_Small_DDS1.10
DDS_OUT2: U6_U_PGA_Block2.2 U8_U_Small_DDS2.10
DDS_OUT3: U6_U_PGA_Block3.2 U8_U_Small_DDS3.10
DDS_OUT4: U6_U_PGA_Block4.2 U8_U_Small_DDS4.10
DDS_RX: U1.GP16
DDS_SCK: U1.GP18
DDS_SCLK: U8_U_Small_DDS1.7 U8_U_Small_DDS2.7 U8_U_Small_DDS3.7 U8_U_Small_DDS4.7
DDS_SDAT: U8_U_Small_DDS1.6 U8_U_Small_DDS2.6 U8_U_Small_DDS3.6 U8_U_Small_DDS4.6
DDS_TX: U1.GP19
FROM_BRAIN1: J1.2 R7_U_Current_Measure1.1 U2_U_Current_Measure1.2
FROM_BRAIN2: J2.2 R7_U_Current_Measure2.1 U2_U_Current_Measure2.2
FROM_BRAIN3: J3.2 R7_U_Current_Measure3.1 U2_U_Current_Measure3.2
FROM_BRAIN4: J4.2 R7_U_Current_Measure4.1 U2_U_Current_Measure4.2
GND: C2.2 C3.1 C4.1 C5.1 C6.1 C7.1 C8.1 C9.1 C16.1 C17.1 C20.1 C21.1 C22_U_PGA_Block1.1 C22_U_PGA_Block2.1 C22_U_PGA_Block3.1 C22_U_PGA_Block4.1 C23.1 C24.1 C28_U_Small_DDS1.1 C28_U_Small_DDS2.1 C28_U_Small_DDS3.1 C28_U_Small_DDS4.1 C29_U_Small_DDS1.1 C29_U_Small_DDS2.1 C29_U_Small_DDS3.1 C29_U_Small_DDS4.1 C30_U_Small_DDS1.1 C30_U_Small_DDS2.1 C30_U_Small_DDS3.1 C30_U_Small_DDS4.1 D2.2 D3.1 J1.3 J1.4 J2.3 J2.4 J3.3 J3.4 J4.3 J4.4 L1.5 P1.2 Q1_U_Current_Source1.2 Q1_U_Current_Source2.2 Q1_U_Current_Source3.2 Q1_U_Current_Source4.2 Q2_U_Current_Source1.2 Q2_U_Current_Source2.2 Q2_U_Current_Source3.2 Q2_U_Current_Source4.2 R4.1 R8.1 S1.3 S1.4 S1.5 T1.3 T2.3 T3.3 T4.3 U2_U_Current_Measure1.5 U2_U_Current_Measure1.10 U2_U_Current_Measure2.5 U2_U_Current_Measure2.10 U2_U_Current_Measure3.5 U2_U_Current_Measure3.10 U2_U_Current_Measure4.5 U2_U_Current_Measure4.10 U4.2 U5.1 U6_U_PGA_Block1.3 U6_U_PGA_Block1.4 U6_U_PGA_Block2.3 U6_U_PGA_Block2.4 U6_U_PGA_Block3.3 U6_U_PGA_Block3.4 U6_U_PGA_Block4.3 U6_U_PGA_Block4.4 U7.2 U7.4 U8_U_Small_DDS1.4 U8_U_Small_DDS1.9 U8_U_Small_DDS2.4 U8_U_Small_DDS2.9 U8_U_Small_DDS3.4 U8_U_Small_DDS3.9 U8_U_Small_DDS4.4 U8_U_Small_DDS4.9 U9.4 U9.9 U10.8 U11_U_Current_Source1.1 U11_U_Current_Source1.9@1225,4510 U11_U_Current_Source2.1 U11_U_Current_Source2.9@1220,3835 U11_U_Current_Source3.1 U11_U_Current_Source3.9@1225,3040 U11_U_Current_Source4.1 U11_U_Current_Source4.9@1215,2275 U12_U_Current_Source1.1 U12_U_Current_Source1.9@1170,4290 U12_U_Current_Source2.1 U12_U_Current_Source2.9@1165,3615 U12_U_Current_Source3.1 U12_U_Current_Source3.9@1170,2820 U12_U_Current_Source4.1 U12_U_Current_Source4.9@1160,2055 U13.1 U13.3 U13.9@1541.65,1695 X1.2 X1.4 | length 834
  Top Layer w10: v1(566.69,2111.69) Q2_U_Current_Source4.2 ; v1(571.69,3671.69) Q2_U_Current_Source2.2 ; v1(576.69,2876.69) Q2_U_Current_Source3.2 ; v1(576.69,4346.69) Q2_U_Current_Source1.2 ; v1(801.69,2113.31) Q1_U_Current_Source4.2 ; v1(806.69,3673.31) Q1_U_Current_Source2.2 ; v1(811.69,2878.31) Q1_U_Current_Source3.2 ; v1(811.69,4348.31) Q1_U_Current_Source1.2 ; U11_U_Current_Source4.1 v1(1111.65,2401.65) ; U11_U_Current_Source2.1 v1(1116.65,3961.65) ; U11_U_Current_Source3.1 v1(1121.65,3166.65) ; U11_U_Current_Source1.1 v1(1121.65,4636.65) ; v1(1263.35,1933.35) U12_U_Current_Source4.1 ; v1(1268.35,3493.35) U12_U_Current_Source2.1 ; v1(1273.35,2698.35) U12_U_Current_Source3.1 ; v1(1273.35,4168.35) U12_U_Current_Source1.1
  other v2: 553.35,1026.69 596.65,1026.69 553.35,1070 596.65,1070 553.35,1113.31 596.65,1113.31 1516.06,1669.41 1567.24,1669.41 1516.06,1720.59 1567.24,1720.59 1134.41,2029.41 1185.59,2029.41 1134.41,2080.59 1185.59,2080.59 1189.41,2249.41 1240.59,2249.41 1189.41,2300.59 1240.59,2300.59 1144.41,2794.41 1195.59,2794.41 1144.41,2845.59 1195.59,2845.59 1199.41,3014.41 1250.59,3014.41 1199.41,3065.59 1250.59,3065.59 1139.41,3589.41 1190.59,3589.41 1139.41,3640.59 1190.59,3640.59 1194.41,3809.41 1245.59,3809.41 1194.41,3860.59 1245.59,3860.59 1144.41,4264.41 1195.59,4264.41 1144.41,4315.59 1195.59,4315.59 1199.41,4484.41 1250.59,4484.41 1199.41,4535.59 1250.59,4535.59
  other v3: 1516.06,1618.23 1567.24,1618.23 1516.06,1771.77 1567.24,1771.77 1134.41,1978.23 1185.59,1978.23 1134.41,2131.77 1185.59,2131.77 1189.41,2198.23 1240.59,2198.23 1189.41,2351.77 1240.59,2351.77 1144.41,2743.23 1195.59,2743.23 1144.41,2896.77 1195.59,2896.77 1199.41,2963.23 1250.59,2963.23 1199.41,3116.77 1250.59,3116.77 1139.41,3538.23 1190.59,3538.23 1139.41,3691.77 1190.59,3691.77 1194.41,3758.23 1245.59,3758.23 1194.41,3911.77 1245.59,3911.77 1144.41,4213.23 1195.59,4213.23 1144.41,4366.77 1195.59,4366.77 1199.41,4433.23 1250.59,4433.23 1199.41,4586.77 1250.59,4586.77
NetC1_1: C1.1 R1.2
NetC5_2: C5.2 U9.2
NetC27_U_Small_DDS1_1: C27_U_Small_DDS1.1 U8_U_Small_DDS1.1
NetC27_U_Small_DDS2_1: C27_U_Small_DDS2.1 U8_U_Small_DDS2.1
NetC27_U_Small_DDS3_1: C27_U_Small_DDS3.1 U8_U_Small_DDS3.1
NetC27_U_Small_DDS4_1: C27_U_Small_DDS4.1 U8_U_Small_DDS4.1
NetC30_U_Small_DDS1_2: C30_U_Small_DDS1.2 U8_U_Small_DDS1.3
NetC30_U_Small_DDS2_2: C30_U_Small_DDS2.2 U8_U_Small_DDS2.3
NetC30_U_Small_DDS3_2: C30_U_Small_DDS3.2 U8_U_Small_DDS3.3
NetC30_U_Small_DDS4_2: C30_U_Small_DDS4.2 U8_U_Small_DDS4.3
NetD1_2: D1.2 L1.6
NetD4_1: D4.1 L1.4
NetD5_1: D5.1 D6.1
NetR2_2: R2.2 U9.6
NetR3_2: R3.2 U9.7
NetR10_U_Current_Source1_1: R10_U_Current_Source1.1 R11_U_Current_Source1.1 U11_U_Current_Source1.2 | length 124.3
  Top Layer w10: R11_U_Current_Source1.1 999.84,4540.16 1054.84,4540.16 R10_U_Current_Source1.1 1057.66,4537.66 1119,4537.66 U11_U_Current_Source1.2
NetR10_U_Current_Source1_2: R10_U_Current_Source1.2 R12_U_Current_Source1.2 U11_U_Current_Source1.6 | length 669.4
  Top Layer w10: R10_U_Current_Source1.2 1055,4635 1090,4670 1365,4670 1425,4610 1425,4517.72 1389.63,4482.34 1331,4482.34 U11_U_Current_Source1.6
NetR10_U_Current_Source2_1: R10_U_Current_Source2.1 R11_U_Current_Source2.1 U11_U_Current_Source2.2 | length 124.3
  Top Layer w10: R11_U_Current_Source2.1 994.84,3865.16 1049.84,3865.16 R10_U_Current_Source2.1 1052.66,3862.66 1114,3862.66 U11_U_Current_Source2.2
NetR10_U_Current_Source2_2: R10_U_Current_Source2.2 R12_U_Current_Source2.2 U11_U_Current_Source2.6 | length 669.4
  Top Layer w10: R10_U_Current_Source2.2 1050,3960 1085,3995 1360,3995 1420,3935 1420,3842.72 1384.63,3807.34 1326,3807.34 U11_U_Current_Source2.6
NetR10_U_Current_Source3_1: R10_U_Current_Source3.1 R11_U_Current_Source3.1 U11_U_Current_Source3.2 | length 124.3
  Top Layer w10: R11_U_Current_Source3.1 999.84,3070.16 1054.84,3070.16 R10_U_Current_Source3.1 1057.66,3067.66 1119,3067.66 U11_U_Current_Source3.2
NetR10_U_Current_Source3_2: R10_U_Current_Source3.2 R12_U_Current_Source3.2 U11_U_Current_Source3.6 | length 669.4
  Top Layer w10: R10_U_Current_Source3.2 1055,3165 1090,3200 1365,3200 1425,3140 1425,3047.72 1389.63,3012.34 1331,3012.34 U11_U_Current_Source3.6
NetR10_U_Current_Source4_1: R10_U_Current_Source4.1 R11_U_Current_Source4.1 U11_U_Current_Source4.2 | length 124.3
  Top Layer w10: R11_U_Current_Source4.1 989.84,2305.16 1044.84,2305.16 R10_U_Current_Source4.1 1047.66,2302.66 1109,2302.66 U11_U_Current_Source4.2
NetR10_U_Current_Source4_2: R10_U_Current_Source4.2 R12_U_Current_Source4.2 U11_U_Current_Source4.6 | length 669.4
  Top Layer w10: R10_U_Current_Source4.2 1045,2400 1080,2435 1355,2435 1415,2375 1415,2282.72 1379.63,2247.34 1321,2247.34 U11_U_Current_Source4.6
NetR13_U_Current_Source1_1: R13_U_Current_Source1.1 R14_U_Current_Source1.2 U11_U_Current_Source1.3 | length 254.8
  Top Layer w10: R14_U_Current_Source1.2 1004.53,4354.69 999.68,4359.53 R13_U_Current_Source1.1 U11_U_Current_Source1.3
NetR13_U_Current_Source2_1: R13_U_Current_Source2.1 R14_U_Current_Source2.2 U11_U_Current_Source2.3 | length 254.8
  Top Layer w10: R14_U_Current_Source2.2 999.53,3679.69 994.68,3684.53 R13_U_Current_Source2.1 U11_U_Current_Source2.3
NetR13_U_Current_Source3_1: R13_U_Current_Source3.1 R14_U_Current_Source3.2 U11_U_Current_Source3.3 | length 254.8
  Top Layer w10: R14_U_Current_Source3.2 1004.53,2884.69 999.68,2889.53 R13_U_Current_Source3.1 U11_U_Current_Source3.3
NetR13_U_Current_Source4_1: R13_U_Current_Source4.1 R14_U_Current_Source4.2 U11_U_Current_Source4.3 | length 254.8
  Top Layer w10: R14_U_Current_Source4.2 994.53,2119.69 989.68,2124.53 R13_U_Current_Source4.1 U11_U_Current_Source4.3
NetR14_U_Current_Source1_1: R14_U_Current_Source1.1 U12_U_Current_Source1.2 U12_U_Current_Source1.6 | length 705.4
  Top Layer w10: U12_U_Current_Source1.6 1066.5,4315.16 1005.16,4315.16 R14_U_Current_Source1.1 1003.03,4315.32 998.19,4310.47 998.19,4308.5 980,4290.32 980,4190 1040,4130 1285,4130 1320,4165 1320,4232.13 1287.13,4265 U12_U_Current_Source1.2
NetR14_U_Current_Source2_1: R14_U_Current_Source2.1 U12_U_Current_Source2.2 U12_U_Current_Source2.6 | length 705.4
  Top Layer w10: U12_U_Current_Source2.6 1061.5,3640.16 1000.16,3640.16 R14_U_Current_Source2.1 998.03,3640.32 993.19,3635.47 993.19,3633.5 975,3615.32 975,3515 1035,3455 1280,3455 1315,3490 1315,3557.13 1282.13,3590 U12_U_Current_Source2.2
NetR14_U_Current_Source3_1: R14_U_Current_Source3.1 U12_U_Current_Source3.2 U12_U_Current_Source3.6 | length 705.4
  Top Layer w10: U12_U_Current_Source3.6 1066.5,2845.16 1005.16,2845.16 R14_U_Current_Source3.1 1003.03,2845.31 998.19,2840.47 998.19,2838.5 980,2820.31 980,2720 1040,2660 1285,2660 1320,2695 1320,2762.13 1287.13,2795 U12_U_Current_Source3.2
NetR14_U_Current_Source4_1: R14_U_Current_Source4.1 U12_U_Current_Source4.2 U12_U_Current_Source4.6 | length 705.4
  Top Layer w10: U12_U_Current_Source4.6 1056.5,2080.16 995.16,2080.16 R14_U_Current_Source4.1 993.03,2080.31 988.19,2075.47 988.19,2073.5 970,2055.31 970,1955 1030,1895 1275,1895 1310,1930 1310,1997.13 1277.13,2030 U12_U_Current_Source4.2
NetR16_1: R16.1 R17.1 U13.2
NetU6_U_PGA_Block1_6: U6_U_PGA_Block1.6 U6_U_PGA_Block2.6 U6_U_PGA_Block3.6 U6_U_PGA_Block4.6
NetU6_U_PGA_Block1_7: U6_U_PGA_Block1.7 U6_U_PGA_Block2.7 U6_U_PGA_Block3.7 U6_U_PGA_Block4.7
PGA_SCL: U1.GP9
PGA_SDA: U1.GP8
POW_EN: S1.2
STIM_0: J1.1 T1.6
STIM_1: J2.1 T2.6
STIM_2: J3.1 T3.6
STIM_3: T4.6
SW_OUT: D6.2 L1.1 R1.1 R2.1 U9.5
TC: R3.1 R4.2 U9.8
TF_LOW: R7_U_Current_Measure1.2 R7_U_Current_Measure2.2 R7_U_Current_Measure3.2 R7_U_Current_Measure4.2 U2_U_Current_Measure1.3 U2_U_Current_Measure2.3 U2_U_Current_Measure3.3 U2_U_Current_Measure4.3
TF_LOW1: T1.4
TF_LOW2: T2.4
TF_LOW3: T3.4
TF_LOW4: J4.1 T4.4
VBAT: P1.1 S1.1
Wave_Out1: U6_U_PGA_Block1.1
Wave_Out2: U6_U_PGA_Block2.1
Wave_Out3: U6_U_PGA_Block3.1
Wave_Out4: U6_U_PGA_Block4.1
XTAL: C7.2 R9.1 U10.2 X1.1